# EAGLE board TeamFlag (EAGLE 9.4.2)
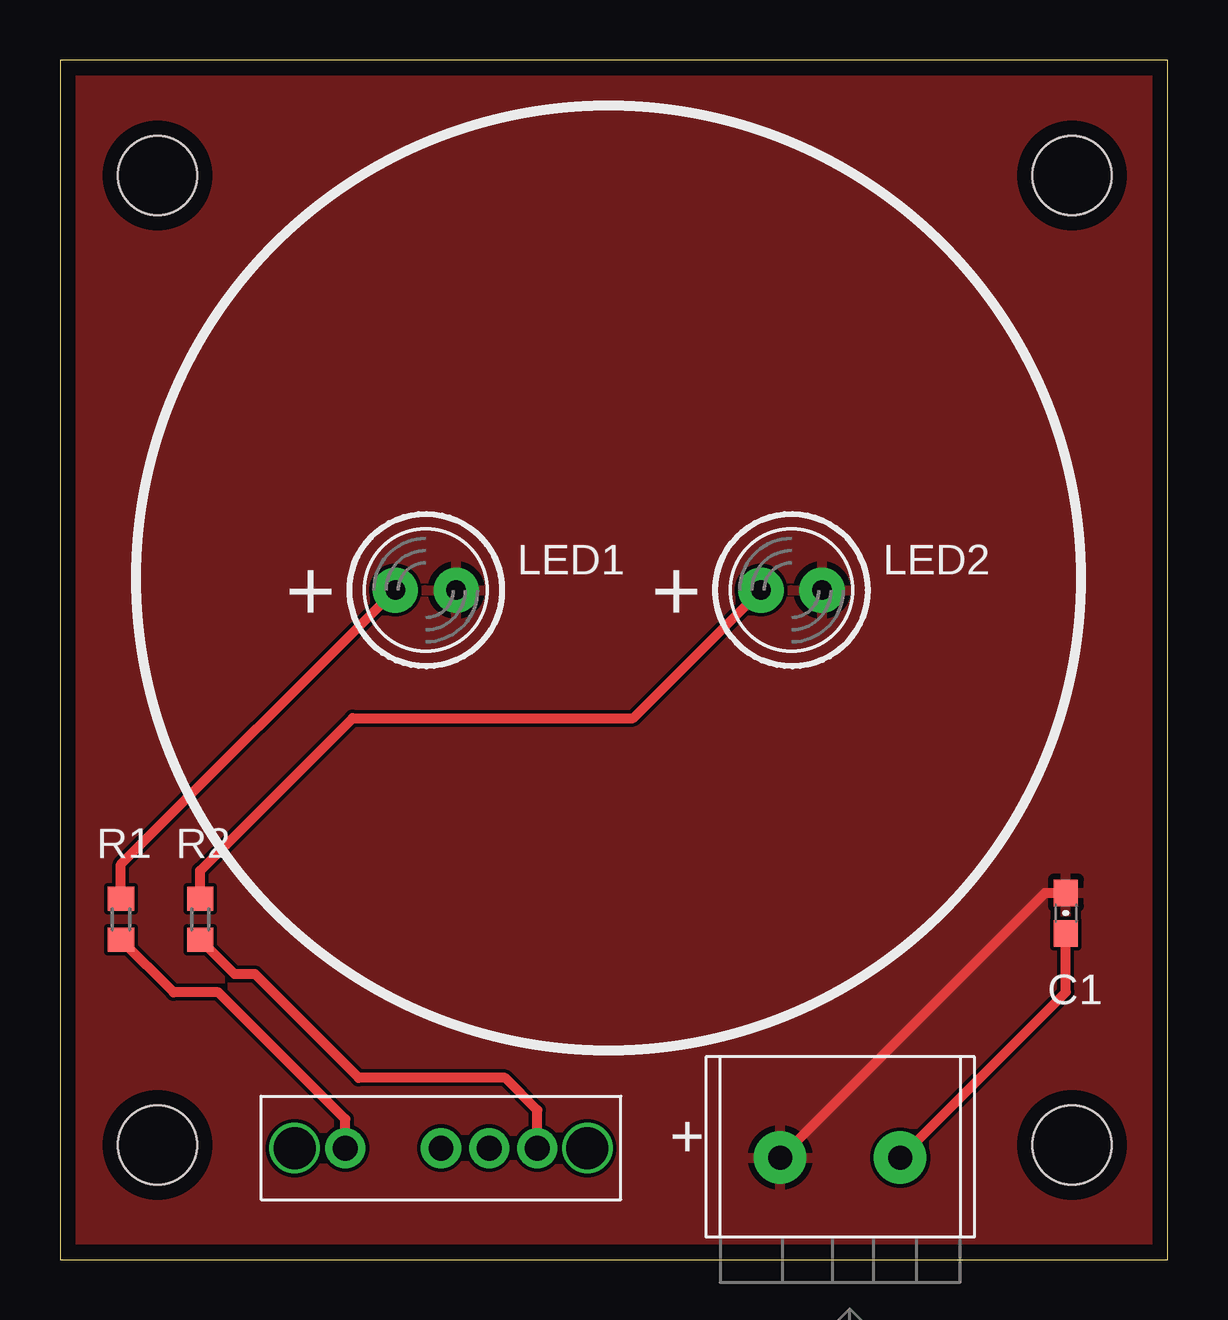
[diagram p0: board, top side]
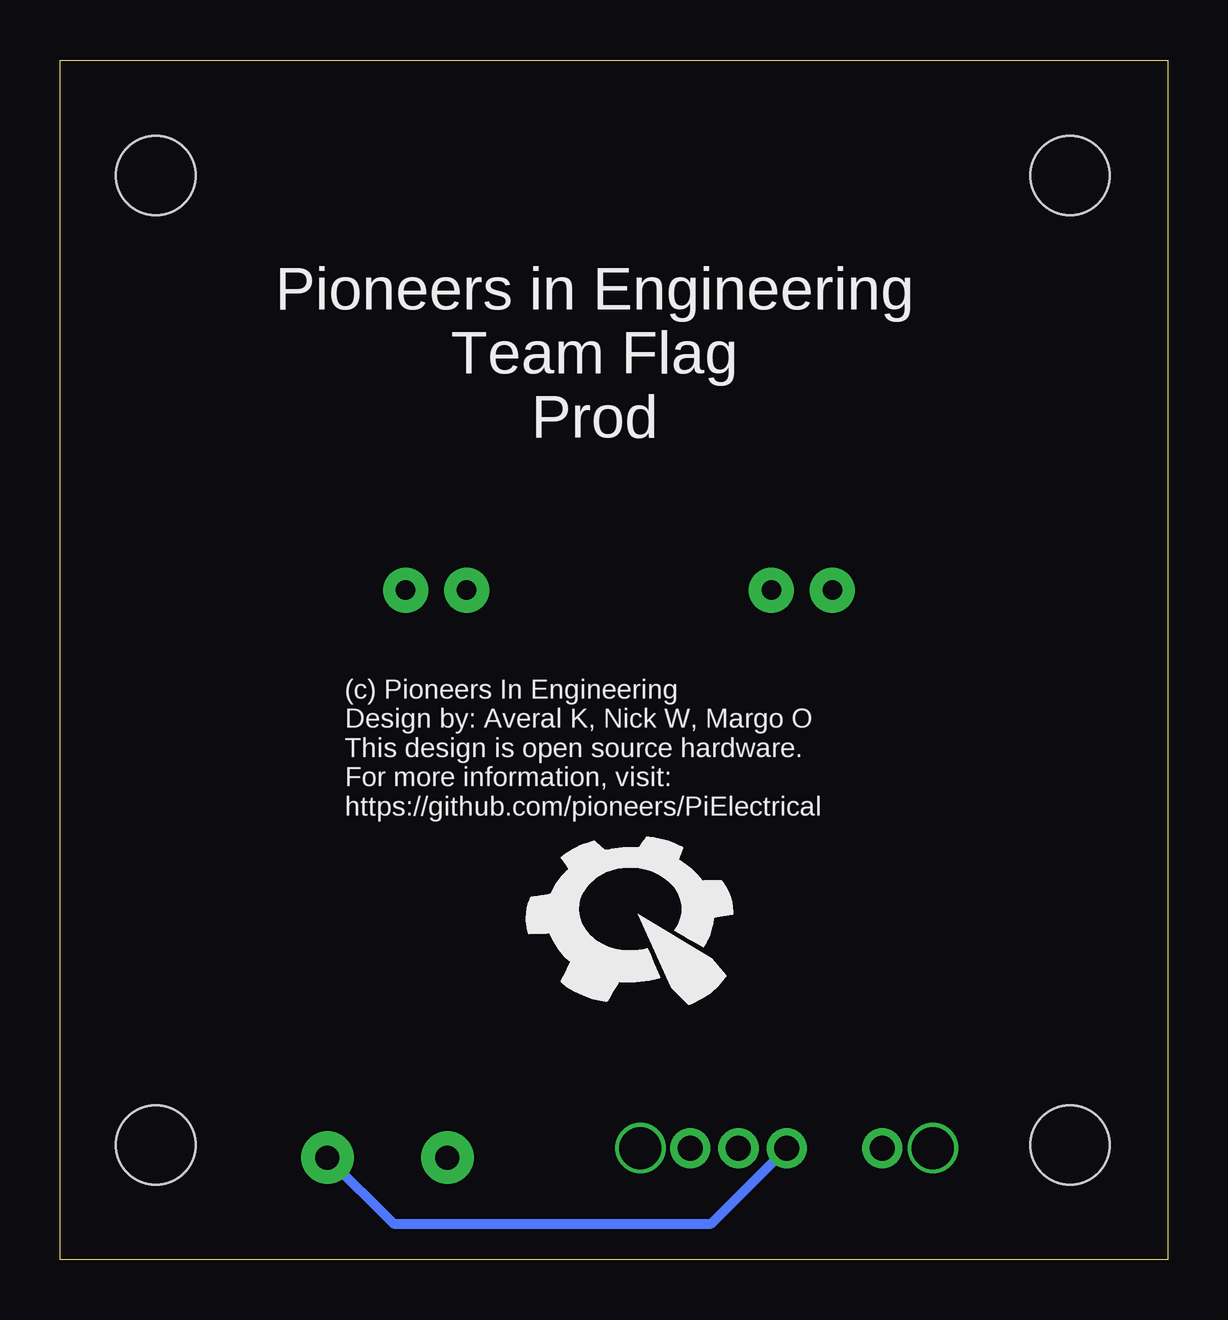
[diagram p1: board, bottom side, seen from below]

Size 46.15 x 49.99 mm. Coordinates in mm from the lower left corner, seen from the top.
Outline: 0,0 46.15,0 46.15,49.99 0,49.99 0,0
Copper layers (1*16): Top 2mil / dielectric 9mil / Bottom 2mil
Design rules "pie": minimum track width 6mil, minimum drill 15mil, track to track 6mil, track to pad 6mil, pad to pad 6mil, via to via 6mil, smd to smd 6mil, copper to edge 25mil, drill to drill 7mil, minimum pad ring 7mil, minimum via ring 7mil, stop-mask expansion 3mil, vias tented up to drill 21mil, thermal gap 10mil

## Footprints (pad centres in the part's own frame; a part is rotated, then mirrored left to right if it is on the bottom)
0603-CAP = smd 1.1 x 1: 1 -0.85,0; 2 0.85,0
LED5MM-NOFLAT = drill 0.813 pad 1.88: A -1.27,0; K 1.27,0
R0603 = smd 1 x 1.1: 1 -0.85,0; 2 0.85,0
2PIN_SCREW = drill 1 pad 2.184: P$1 3.1,3.3; P$2 8.1,3.3
SP3T_SLIDE_SWITCH = drill 1.753 pad 1.93: P$3 1.397,2.146; P$4 13.589,2.146 | drill 1.041 pad 1.676: PIN1 3.505,2.146; PIN2 7.493,2.146; PIN3 9.5,2.146; PIN4 11.506,2.146
STAND-OFF = hole 3.302: 0,0

## Placement (x,y rotation side)
C1  0.1uF  [0603-CAP]  41.91,14.44 270 top
LED1  Yellow  [LED5MM-NOFLAT]  15.24,27.9 0 top
LED2  Blue  [LED5MM-NOFLAT]  30.48,27.9 0 top
R1  130  [R0603]  2.54,14.18 270 top
R2  130  [R0603]  5.84,14.18 270 top
ST1  2PIN_SCREW  [2PIN_SCREW]  26.91,0.95 0 top
U$2  SP3T_SLIDE_SWITCH  [SP3T_SLIDE_SWITCH]  8.38,2.5 0 top
U$3  [STAND-OFF]  4.06,45.17 0 top
U$4  [STAND-OFF]  42.16,45.17 0 top
U$5  [STAND-OFF]  4.06,4.78 0 top
U$6  [STAND-OFF]  42.16,4.78 0 top
U$7  [PIE-LOGO-SMALL]  22.1,14.44 0 bottom

## Library data of the parts
C1 = pie; PIE-INT-REF-NUM: CAPACITOR-GENERIC
LED1 LED2 = pie; PIE-INT-REF-NUM: LED
R1 R2 = pie; DESCRIPTION: RESISTOR, American symbol; DISTRIBUTOR: DigiKey; MANUFACTURER: Rohm Semiconductor; NOTES: Cut Tape; PACKAGE: R0603
ST1 U$2-U$7 = pie

## Nets
GND: C1.1 LED1.K LED2.K ST1.P$1
N$2: LED1.A R1.1
N$3: LED2.A R2.1
PIN1: R1.2 U$2.PIN1
PIN4: R2.2 U$2.PIN4
VCC: C1.2 ST1.P$2 U$2.PIN2

## Tracks (layer width: path | path; a pad name or v marks a point on that pad's centre or on a via)
GND
  Top 0.406: ST1.P$1 41.04,15.29 C1.1
  pour Top: -0.26,-1.5 -0.26,50 46.23,50 46.23,-1.5
N$2
  Top 0.406: LED1.A 2.54,16.47 R1.1
N$3
  Top 0.406: R2.1 5.84,16.22 12.19,22.57 23.88,22.57 LED2.A
PIN1
  Top 0.406: U$2.PIN1 11.89,5.85 6.6,11.14 4.74,11.14 R1.2
PIN4
  Top 0.406: U$2.PIN4 19.89,6.23 18.54,7.58 12.45,7.58 8.13,11.9 7.28,11.9 R2.2
VCC
  Top 0.406: ST1.P$2 41.91,11.15 C1.2
  Bottom 0.406: U$2.PIN2 19.02,1.5 32.26,1.5 ST1.P$2

## Text on the board
bPlace: Pioneers in Engineering / Team Flag / Prod | (c) Pioneers In Engineering / Design by: Averal K, Nick W, Margo O / This design is open source hardware. / For more information, visit: / https://github.com/pioneers/PiElectrical
tNames: +